# Altium PCB PCB_SBW_Assist.PcbDoc
Units mil, origin at the board's own origin, x right, y up, seen from the top; angles counter-clockwise.
Board outline 6000 x 4000 mil, 2 copper layers (Top Layer, Bottom Layer); 41 components, 16 nets, 108 pads, 0 vias.
Unrouted connection lines stored in the file: 49.
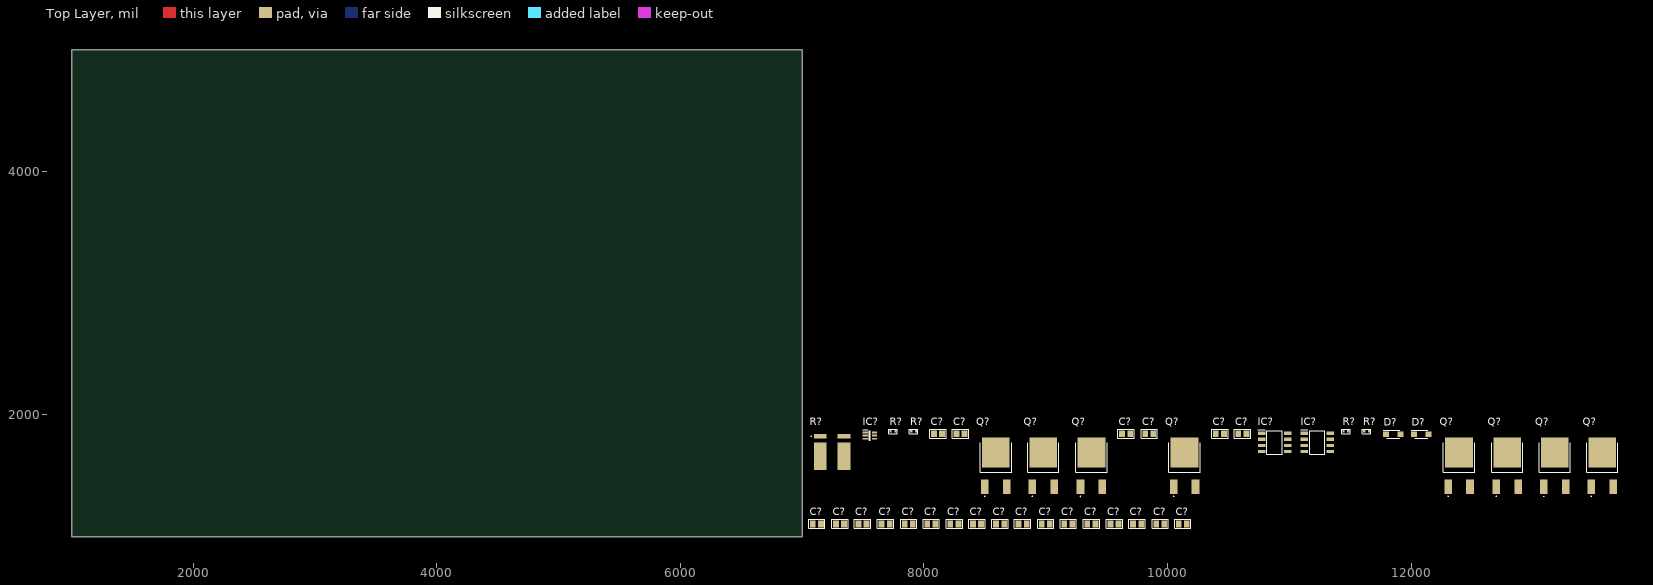
[diagram p0: Top Layer view]
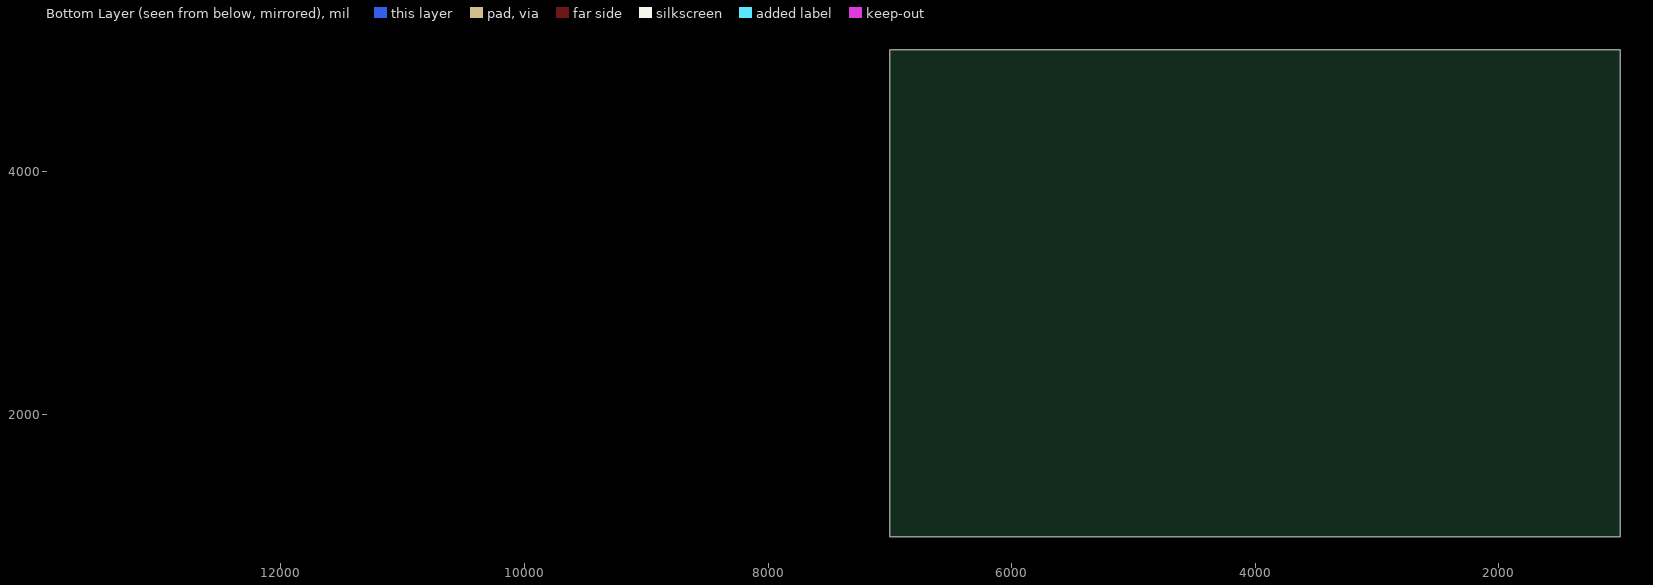
[diagram p1: Bottom Layer view, seen from below]

## Layer stack, top to bottom
Top Solder: solder mask 0.4, Solder Resist, Dk 3.5
Top Layer: signal copper 1.4
Dielectric 1: dielectric 12.6, FR-4, Dk 4.8
Bottom Layer: signal copper 1.4
Bottom Solder: solder mask 0.4, Solder Resist, Dk 3.5

## Board outline
1000,1000 7000,1000 7000,5000 1000,5000

## Design rules (kind name [scope] priority, off if disabled: settings)
Clearance [All] p1: gap=10 ignorepadtopadclearanceinfootprint=FALSE except(0: Arc-Hole Track-Hole SMDPad-Hole THPad-Hole Via-Hole Fill-Hole Poly-Hole Region-Hole Text-Hole)
PolygonConnect [All] p1: connectstyle=Relief reliefconductorwidth=10 reliefentries=4 polygonreliefangle="90 Angle" airgapwidth=10
RoomDefinition PCB_SBW_Assist [InComponentClass('PCB_SBW_Assist')] p1: confinementstyle=ConfineIn formatcopy=TRUE lockcomponents=FALSE outline 7045,1060 13750,1060 13750,1990 7045,1990
RoomDefinition Microcontroller [InComponentClass('Microcontroller')] p2: confinementstyle=ConfineIn formatcopy=TRUE lockcomponents=FALSE outline 7045,1060 11385,1060 11385,1990 7045,1990
RoutingVias [All] p1: holewidth=28 width=50 viastyle="Through Hole" minholewidth=28 minwidth=50 maxholewidth=28 maxwidth=50
SolderMaskExpansion [All] p1: expansion=4
Width [All] p1: maxlimit=10 minlimit=10 preferedwidth=10
30 further rules are at their usual default settings.

## Classes and differential pairs
component class PCB_SBW_Assist: C? D? IC? Q? R?
component class Microcontroller: C? IC? LED? Y?

## Components (designator, comment, footprint, x,y, rotation, side; value= is the part's Value field where it differs from the comment)
C? "C" CAPC1608X09N 7695,980 r0 top value=330n
C? "C" CAPC1608X09N 6940,980 r0 top value=4.7uF
C? "C" CAPC1608X09N 7130,980 r0 top value=4.7uF
C? "C" CAPC1608X09N 7315,980 r0 top value=1uF
C? "C" CAPC1608X09N 7880,980 r0 top value=1uF
C? "C" CAPC1608X09N 8070,980 r0 top value=1uF
C? "C" CAPC1608X09N 9195,980 r0 top value=100n
C? "C" CAPC1608X09N 9385,980 r0 top value=100n
C? "C" CAPC1608X09N 9760,980 r0 top value=8pF
C? "C" CAPC1608X09N 9945,980 r0 top value=2.2uF
C? "C" CAPC1608X09N 9570,980 r0 top value=8pF
C? "C" CAPC1608X09N 8255,980 r0 top value=100nF
C? "C" CAPC1608X09N 7505,980 r0 top value=100nF
C? "C" CAPC1608X09N 8630,980 r0 top value=100nF
C? "C" CAPC1608X09N 8820,980 r0 top value=100nF
C? "C" CAPC1608X09N 9005,980 r0 top value=4.7uF
C? "C" CAPC1608X09N 8445,980 r0 top value=100nF
C? "C" CAPC1608X09N 9670,1720 r0 top value=100n
C? "C" CAPC1608X09N 9480,1720 r0 top value=1u
C? "C" CAPC1608X09N 8120,1720 r0 top value=1u
C? "C" CAPC1608X09N 10250,1720 r0 top value=470n
C? "C" CAPC1608X09N 10435,1720 r0 top value=470n
C? "C" CAPC1608X09N 7935,1720 r0 top value=100n
D? "MBR140SFT1G" SODFL3616X98N 12085,1840 r0 top
D? "MBR140SFT1G" SODFL3616X98N 11855,1840 r0 top
IC? "NCS213RSQT2G" SOT65P210X110-6N 7555,1830 r0 top
IC? "UCC27712DR" SOIC127P600X175-8N 10880,1775 r0 top
IC? "UCC27712DR" SOIC127P600X175-8N 11230,1775 r0 top
Q? "NTD5C632NLT4G" NTD5C632NLT4G 10140,1590 r0 top
Q? "NTD5C632NLT4G" NTD5C632NLT4G 9375,1590 r0 top
Q? "NTD5C632NLT4G" NTD5C632NLT4G 13570,1590 r0 top
Q? "NTD5C632NLT4G" NTD5C632NLT4G 13180,1590 r0 top
Q? "NTD5C632NLT4G" NTD5C632NLT4G 12790,1590 r0 top
Q? "NTD5C632NLT4G" NTD5C632NLT4G 12395,1590 r0 top
Q? "NTD5C632NLT4G" NTD5C632NLT4G 8980,1590 r0 top
Q? "NTD5C632NLT4G" NTD5C632NLT4G 8590,1590 r0 top
R? "R" RESC1005X04N 11465,1865 r0 top value=10R
R? "R" RESC1005X04N 11635,1865 r0 top value=10R
R? "WSL27263L000FEA" WSL27263L000FEA 7245,1695 r0 top
R? "R" RESC1005X04N 7915,1865 r0 top value=10R
R? "R" RESC1005X04N 7745,1865 r0 top value=10R

## Footprints (in the part's own frame and the unit in brackets; to place one, negate y for a bottom-side part, rotate by r counter-clockwise, add the part's x,y. Pads: shape width x height; smd on the part's side, far side on the other; paste and mask are expansions set on the pad)
CAPC1608X09N [mm] "Chip Capacitor, 2-Leads, Body 1.60x0.80mm, IPC Medium Density"
  rect 1.2x1.4 smd: 1(3.722,3.175) 2(5.422,3.175)
  silkscreen extent 2.87,2.23 6.27,4.13, body extent 3.52,2.5 5.62,3.85, height 1.35
NTD5C632NLT4G [mm]
  rect 1.6x3 smd: 1(-2.285,-4.6) 3(2.285,-4.6)
  rect 5.8x6.2 smd: 2(0,2.58)
  silkscreen extent -3.27,-6.6 3.27,4.6, body extent -3.36,-2.92 3.36,7.49, height 2.38
RESC1005X04N [mm] "Chip Resistor, 2-Leads, Body 1.00x0.50mm, IPC Medium Density"
  rect 0.45x0.55 smd: 1(-0.5,0) 2(0.5,0)
  silkscreen extent -0.9,-0.45 0.9,0.45, body extent -0.53,-0.28 0.53,0.28, height 0.37
SODFL3616X98N [mm]
  rect 1.24x1.12 smd: 1(-1.5,0) 2(1.5,0)
  silkscreen extent -2.12,-0.82 1.35,0.82, body extent -1.8,-0.82 1.8,0.82, height 0.98
SOIC127P600X175-8N [mm]
  rect 1.525x0.65 smd: 1(-2.712,1.905) 2(-2.712,0.635) 3(-2.712,-0.635) 4(-2.712,-1.905) 5(2.712,-1.905) 6(2.712,-0.635) 7(2.712,0.635) 8(2.712,1.905)
  silkscreen extent -3.47,-2.45 1.6,2.58, body extent -3,-2.45 3,2.45, height 1.75
SOT65P210X110-6N [mm]
  rect 1.05x0.4 smd: 1(-0.95,0.65) 2(-0.95,0) 3(-0.95,-0.65) 4(0.95,-0.65) 5(0.95,0) 6(0.95,0.65)
  silkscreen extent -1.48,-1 0.08,1.2, body extent -1.05,-1 1.05,1, height 1.1
WSL27263L000FEA [mm]
  rect 2.69x0.89 smd: 1(-2.465,3.3) 4(2.465,3.3)
  rect 2.69x5.71 smd: 2(-2.465,-0.89) 3(2.465,-0.89)
  silkscreen extent -4.4,3.25 -4.3,3.35, body extent -3.45,-3.3 3.45,3.3, height 2.79

## Part data
D? D?: "Diode", Manufacturer_Name=onsemi, Mouser Part Number=863-MBR140SFT1G, Arrow Part Number=MBR140SFT1G, Arrow Price/Stock=https://www.arrow.com/en/products/mbr140sft1g/on-semiconductor?region=nac, Datasheet Link=http://www.onsemi.com/pub/Collateral/MBR140SFT1-D.PDF, Height=0.98mm, Manufacturer_Part_Number=MBR140SFT1G, Mouser Price/Stock=https://www.mouser.co.uk/ProductDetail/onsemi/MBR140SFT1G?qs=3JMERSakebrc0eIUjXPasA%3D%3D
IC?: "Integrated Circuit", Manufacturer_Name=onsemi, Mouser Part Number=863-NCS213RSQT2G, Arrow Part Number=NCS213RSQT2G, Arrow Price/Stock=https://www.arrow.com/en/products/ncs213rsqt2g/on-semiconductor?region=nac, Datasheet Link=http://www.onsemi.com/pub/Collateral/NCS210R-D.PDF, Height=1.1mm, Manufacturer_Part_Number=NCS213RSQT2G, Mouser Price/Stock=https://www.mouser.co.uk/ProductDetail/onsemi/NCS213RSQT2G?qs=y6ZabgHbY%252ByBI46PuwlxCQ%3D%3D
IC? IC?: "Integrated Circuit", Manufacturer_Name="Texas Instruments", Mouser Part Number=595-UCC27712DR, Arrow Part Number=UCC27712DR, Arrow Price/Stock=https://www.arrow.com/en/products/ucc27712dr/texas-instruments?region=nac, Datasheet Link=http://www.ti.com/lit/gpn/ucc27712, Height=1.75mm, Manufacturer_Part_Number=UCC27712DR, Mouser Price/Stock=https://www.mouser.co.uk/ProductDetail/Texas-Instruments/UCC27712DR?qs=HXFqYaX1Q2zHY4iSzkrxAA%3D%3D
Q? Q? Q? Q? Q? Q? Q? Q?: "MOSFET (N-Channel)", Manufacturer_Name=onsemi, Datasheet Link=https://www.onsemi.com/pdf/datasheet/ntd5c632nl-d.pdf, Height=2.51mm, Manufacturer_Part_Number=NTD5C632NLT4G
R?: "Resistor", Manufacturer_Name=Vishay, Mouser Part Number=71-WSL27263L000FEA, Arrow Part Number=WSL27263L000FEA, Arrow Price/Stock=https://www.arrow.com/en/products/wsl27263l000fea/vishay, Datasheet Link=https://www.vishay.com/docs/30131/wsl2726.pdf, Height=2.99mm, Manufacturer_Part_Number=WSL27263L000FEA, Mouser Price/Stock=https://www.mouser.co.uk/ProductDetail/Vishay-Dale/WSL27263L000FEA?qs=eFWhpKjIuGhZ1Mn4MB4N%252Bg%3D%3D

## Nets (pads, with @x,y where several pads share a name; then routed paths per layer and width w, separated by ;. In a path a pad name is that pad's centre, name@x,y a point inside that pad or via, vN(x,y) a via of type N, cw(c..) or ccw(c..) an arc to the next point about the centre after c; other vN are vias at no path point)
AVCC: C?.2@7528.46,1105 C?.2@7718.46,1105 C?.2@8093.46,1105
GND: C?.1@7086.54,1105 C?.1@7276.54,1105 C?.1@7461.54,1105 C?.1@7651.54,1105 C?.1@8026.54,1105 C?.1@8216.54,1105 C?.1@8266.54,1845 C?.1@8401.54,1105 C?.1@8591.54,1105 C?.1@8776.54,1105 C?.1@8966.54,1105 C?.1@9151.54,1105 C?.1@9531.54,1105 C?.1@9626.54,1845 C?.1@9716.54,1105 C?.1@9906.54,1105 C?.2@7908.46,1105 C?.2@8148.46,1845 C?.2@9408.46,1105 C?.2@9883.46,1845 C?.2@10158.46,1105 IC?.4@10773.23,1700 IC?.4@11123.23,1700 R?.3
NetC?_1: C?.1@7841.54,1105
NetC?_2: C?.2@9598.46,1105
NetIC?_1: IC?.1@10773.23,1850
NetIC?_2: IC?.2@10773.23,1800
NetIC?_4: IC?.4@7592.4,1804.41 R?.1@7147.95,1824.92
NetIC?_5: IC?.5@11336.77,1700 R?.2@7934.69,1865
NetIC?_7: IC?.7@11336.77,1800 R?.2@11654.69,1865
NetQ?_1: Q?.1@9285.04,1408.9 Q?.1@10050.04,1408.9 R?.1@7895.31,1865
NetQ?_2: Q?.2@9375,1691.57 Q?.2@10140,1691.57 Q?.3@13269.96,1408.9 Q?.3@13659.96,1408.9
NetQ?_3: Q?.3@8679.96,1408.9 Q?.3@9069.96,1408.9 Q?.3@9464.96,1408.9 Q?.3@10229.96,1408.9 R?.2@7147.95,1659.96
PH0: C?.2@9783.46,1105 IC?.5@7592.4,1830
PH1: C?.2@9973.46,1105 IC?.6@7592.4,1855.59
V5: C?.1@9341.54,1105 C?.2@7343.46,1105 C?.2@8283.46,1105 IC?.1@7517.6,1855.59 IC?.3@7517.6,1804.41
VCC: C?.2@7153.46,1105 C?.2@8468.46,1105 C?.2@8658.46,1105 C?.2@8843.46,1105 C?.2@9033.46,1105 C?.2@9218.46,1105 IC?.2@7517.6,1830
pads on no net: C?.1@8081.54,1845 C?.1@9816.54,1845 C?.1@10091.54,1105 C?.1@10396.54,1845 C?.1@10581.54,1845 C?.2@8333.46,1845 C?.2@9693.46,1845 C?.2@10463.46,1845 C?.2@10648.46,1845 D?.1 D?.2 IC?.1@11123.23,1850 IC?.2@11123.23,1800 IC?.3@10773.23,1750 IC?.3@11123.23,1750 IC?.5@10986.77,1700 IC?.6@10986.77,1750 IC?.6@11336.77,1750 IC?.7@10986.77,1800 IC?.8 Q?.1@8500.04,1408.9 Q?.1@8890.04,1408.9 Q?.1@12305.04,1408.9 Q?.1@12700.04,1408.9 Q?.1@13090.04,1408.9 Q?.1@13480.04,1408.9 Q?.2@8590,1691.57 Q?.2@8980,1691.57 Q?.2@12395,1691.57 Q?.2@12790,1691.57 Q?.2@13180,1691.57 Q?.2@13570,1691.57 Q?.3@12484.96,1408.9 Q?.3@12879.96,1408.9 R?.1@7725.31,1865 R?.1@11445.32,1865 R?.1@11615.32,1865 R?.2@7764.69,1865 R?.2@11484.69,1865 R?.4